# EAGLE board ADXL_ADXRS Breakout Pod RevA (EAGLE 9.6.2)
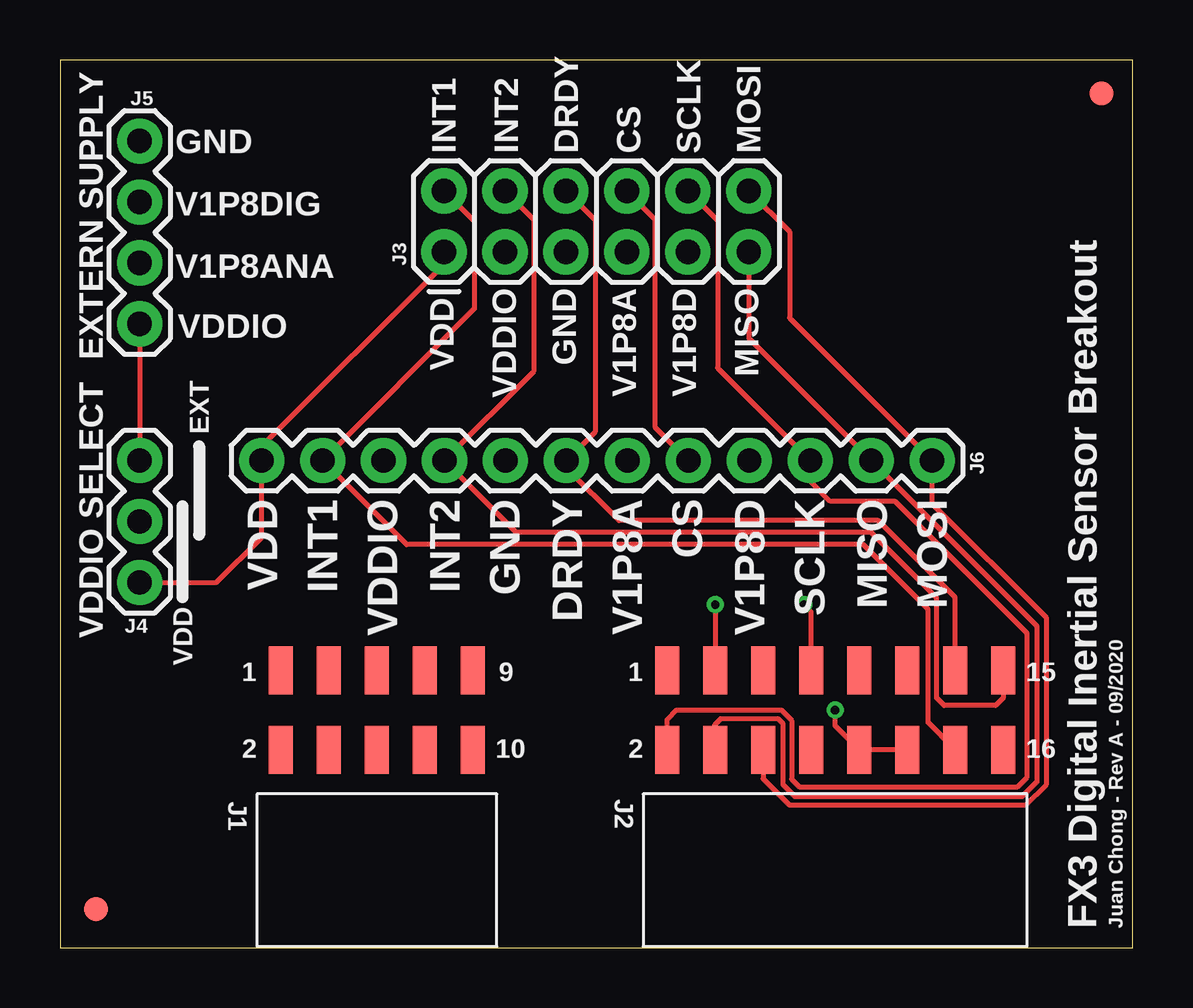
[diagram p0: board, top side]
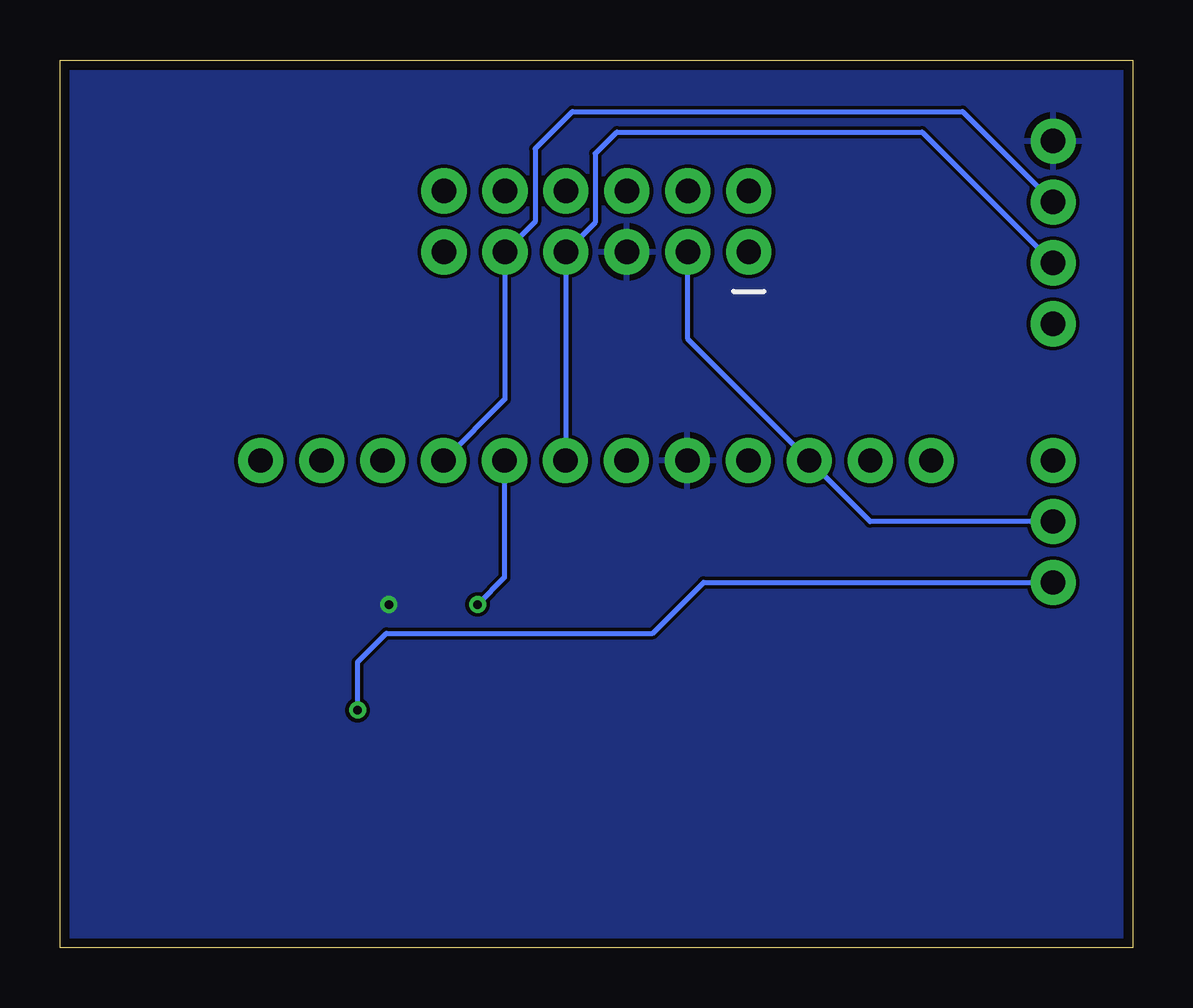
[diagram p1: board, bottom side, seen from below]

Size 44.7 x 37 mm. Coordinates in mm from the lower left corner, seen from the top.
Outline: 0,0 44.7,0 44.7,37 0,37 0,0
Copper layers (1*16): Top 0.0356mm / dielectric 1.5011mm / Bottom 0.0356mm
Design rules "LaenPCBOrder_FilledVias *": minimum track width 6mil, minimum drill 10mil, track to track 6mil, track to pad 6mil, pad to pad 6mil, via to via 6mil, smd to smd 6mil, copper to edge 15mil, drill to drill 6mil, minimum pad ring 7mil, minimum via ring 7mil, stop-mask expansion 4mil, vias tented up to drill 20mil, thermal gap 10mil

## Footprints (pad centres in the part's own frame; a part is rotated, then mirrored left to right if it is on the bottom)
FIDUCIAL-1X2 = smd 1 x 1: 1 0,0
M22-6550542R = smd 1 x 2: 1 4,-1.65; 2 4,1.65; 3 2,-1.65; 4 2,1.65; 5 0,-1.65; 6 0,1.65; 7 -2,-1.65; 8 -2,1.65; 9 -4,-1.65; 10 -4,1.65
M22-6550842R = smd 1 x 2: 1 7,-1.65; 2 7,1.65; 3 5,-1.65; 4 5,1.65; 5 3,-1.65; 6 3,1.65; 7 1,-1.65; 8 1,1.65; 9 -1,-1.65; 10 -1,1.65; 11 -3,-1.65; 12 -3,1.65; 13 -5,-1.65; 14 -5,1.65; 15 -7,-1.65; 16 -7,1.65
2X6 = drill 1.016 pad 1.88: 1 0,0; 2 0,2.54; 3 2.54,0; 4 2.54,2.54; 5 5.08,0; 6 5.08,2.54; 7 7.62,0; 8 7.62,2.54; 9 10.16,0; 10 10.16,2.54; 11 12.7,0; 12 12.7,2.54
1X03 = drill 1.016 pad 1.88: 1 0,0; 2 2.54,0; 3 5.08,0
1X04 = drill 1.016 pad 1.88: 1 0,0; 2 2.54,0; 3 5.08,0; 4 7.62,0
1X12 = drill 1.016 pad 1.88: 1 0,0; 2 2.54,0; 3 5.08,0; 4 7.62,0; 5 10.16,0; 6 12.7,0; 7 15.24,0; 8 17.78,0; 9 20.32,0; 10 22.86,0; 11 25.4,0; 12 27.94,0

## Placement (x,y rotation side)
FD1  FIDUCIAL1X2  [FIDUCIAL-1X2]  1.5,1.6 0 top
FD2  FIDUCIAL1X2  [FIDUCIAL-1X2]  43.4,35.6 0 top
J1  [M22-6550542R]  13.2,9.9 180 top
J2  [M22-6550842R]  32.3,9.9 180 top
J3  2X6 FEMALE  [2X6]  16,29 0 top
J4  VDDIO SELECT  [1X03]  3.32,15.22 90 top
J5  V_EXTERN  [1X04]  3.32,26 90 top
J6  [1X12]  8.4,20.3 0 top

## Library data of the parts
FD1 FD2 = SparkFun-Aesthetics
J1 J2 = ADI_iSensors_Misc
J3 = SparkFun-Connectors; PROD_ID: CONN-12423
J4 = SparkFun-Connectors; PROD_ID: XXX-00000
J5 = SparkFun-Connectors; PROD_ID: CONN-09696
J6 = SparkFun-Connectors

## Nets
CS: J2.3 J3.8 J6.8
DIO4: J2.16
DRDY/DIO1: J2.13 J3.6 J6.6
GND: J2.7 J3.5 J5.4 J6.5
INT1/DIO2: J2.14 J3.2 J6.2
INT2/DIO3: J2.15 J3.4 J6.4
MISO: J2.4 J3.11 J6.11
MOSI: J2.6 J3.12 J6.12
SCLK: J2.2 J3.10 J6.10
V1P8ANA: J3.7 J5.2 J6.7
V1P8DIG: J3.9 J5.3 J6.9
VDD: J2.10 J2.12 J3.1 J4.1 J6.1
VDDIO: J4.3 J5.1
VDDIO_SEL: J3.3 J4.2 J6.3

## Tracks (layer width: path | path; a pad name or v marks a point on that pad's centre or on a via)
CS  (via drill 0.35)
  Top 0.2: J6.8 24.81,21.67 24.81,30.35 J3.8 | v27.3,14.3 J2.3
  Bottom 0.2: J6.8 26.18,15.42 v27.3,14.3
DRDY/DIO1
  Top 0.2: J2.13 37.3,14.6 34.1,17.8 23.3,17.8 21.1,20 J6.6 22.3,21.5 22.3,30.32 J3.6
GND  (via drill 0.35)
  Top 0.2: J2.7 31.3,14 v31,14.3
  Bottom 0.2: v31,14.3 30.8,14.5
  pour Bottom: -0.9,-1.1 45.1,-1.1 45.1,36.5 -0.9,36.5
INT1/DIO2
  Top 0.2: J2.14 36.17,9.38 36.17,14.1 33.47,16.8 14.44,16.8 J6.2 17.27,26.63 17.27,30.27 J3.2
INT2/DIO3
  Top 0.2: J2.15 39.3,10.4 38.98,10.09 36.84,10.09 36.52,10.4 36.52,14.57 33.8,17.3 19.02,17.3 J6.4 19.73,24.01 19.73,30.35 J3.4
MISO
  Top 0.2: J2.4 27.28,8.27 27.28,9.28 27.55,9.54 29.91,9.54 30.11,9.34 30.11,6.79 30.61,6.3 40.1,6.3 40.7,6.9 40.7,13.4 J6.11 28.7,25.4 J3.11
MOSI
  Top 0.2: J2.6 29.3,7.04 30.39,5.95 40.25,5.95 41.11,6.81 41.11,13.73 36.34,18.5 J6.12 30.4,26.24 30.4,29.84 J3.12
SCLK
  Top 0.2: J2.2 25.3,9.5 25.7,9.9 30.06,9.9 30.49,9.47 30.49,7.01 30.8,6.7 39.9,6.7 40.3,7.1 40.3,13.1 34.8,18.6 32.1,18.6 31.26,19.44 J6.10 27.4,24.16 27.4,30.3 J3.10
V1P8ANA
  Bottom 0.2: J6.7 23.62,20.32 J3.7 22.4,30.22 22.4,33.1 21.5,34 8.78,34 J5.2
V1P8DIG
  Bottom 0.2: J6.9 26.16,22.86 J3.9 24.9,30.26 24.9,33.3 23.35,34.85 7.09,34.85 J5.3
VDD  (via drill 0.35)
  Top 0.2: J4.1 6.52,15.22 8.4,17.1 J6.1 8.4,20.9 16,28.5 J3.1 | J2.12 J2.10 32.3,9.25 v32.3,9.9
  Bottom 0.2: v32.3,9.9 32.3,11.9 31.1,13.1 20,13.1 17.88,15.22 J4.1
VDDIO
  Top 0.2: J5.1 3.32,24.82 J4.3
VDDIO_SEL
  Bottom 0.2: J4.2 10.94,17.76 J6.3 18.54,25.36 J3.3

## Text on the board
tNames: GND | INT1 | INT2 | DRDY | CS | SCLK | MOSI | V1P8DIG | V1P8ANA | VDDIO | GND | V1P8A | V1P8D | MISO | VDD | VDDIO | EXTERN SUPPLY | EXT | VDD | INT1 | VDDIO | INT2 | GND | DRDY | V1P8A | CS | V1P8D | SCLK | MISO | MOSI | VDD | VDDIO SELECT | FX3 Digital Inertial Sensor Breakout | Juan Chong - Rev A - 09/2020